# Altium PCB PCBCharger.PcbDoc
Units mil, origin at the board's own origin, x right, y up, seen from the top; angles counter-clockwise.
Board outline 1545 x 1485 mil, 2 copper layers (Top Layer, Bottom Layer); 18 components, 9 nets, 52 pads, 10 vias.
Unrouted connection lines stored in the file: 3.
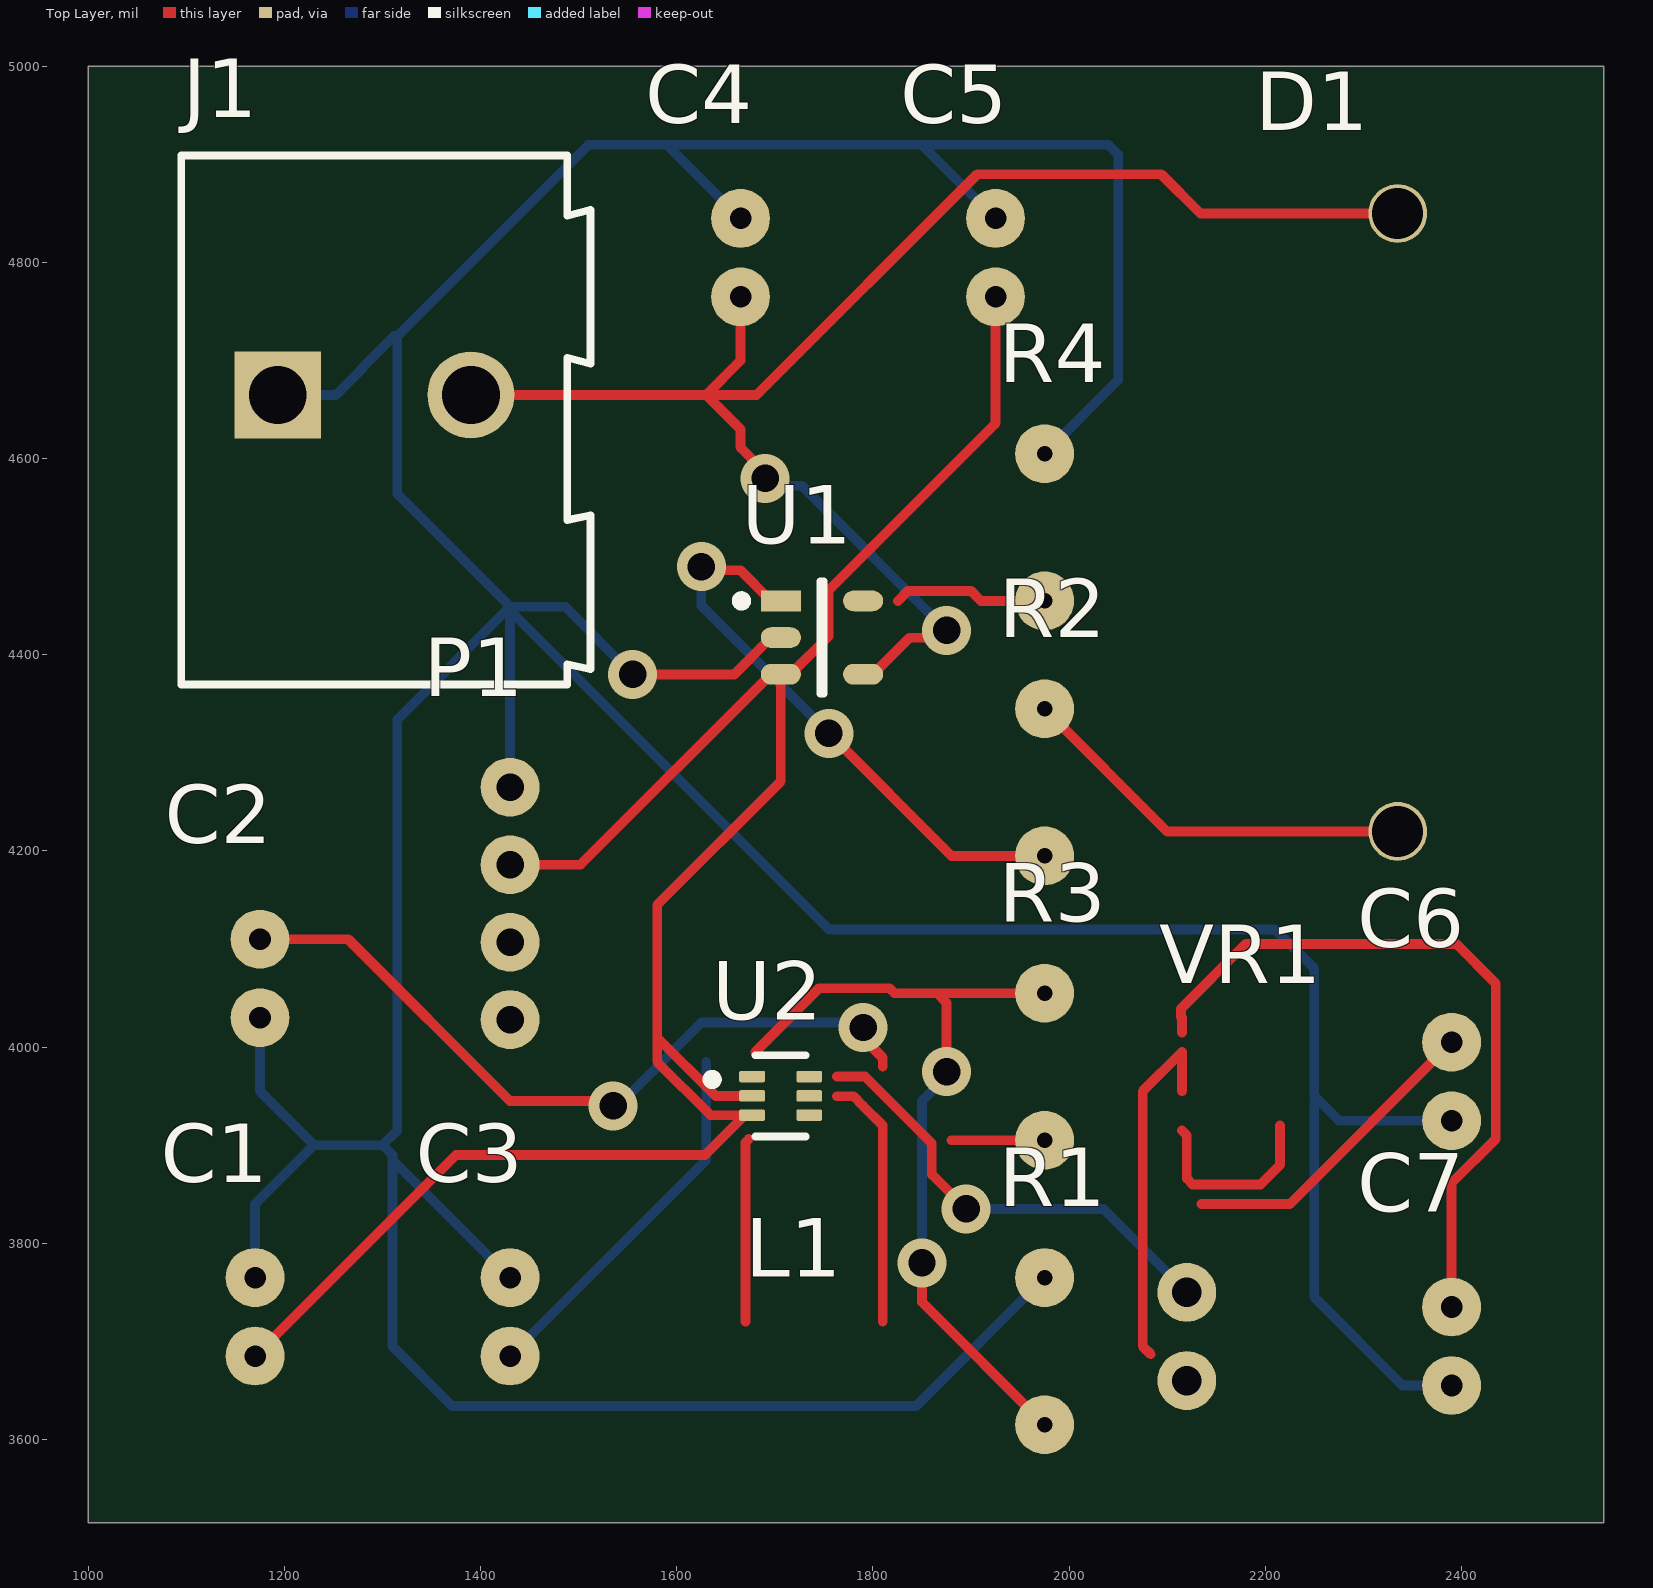
[diagram p0: Top Layer view]
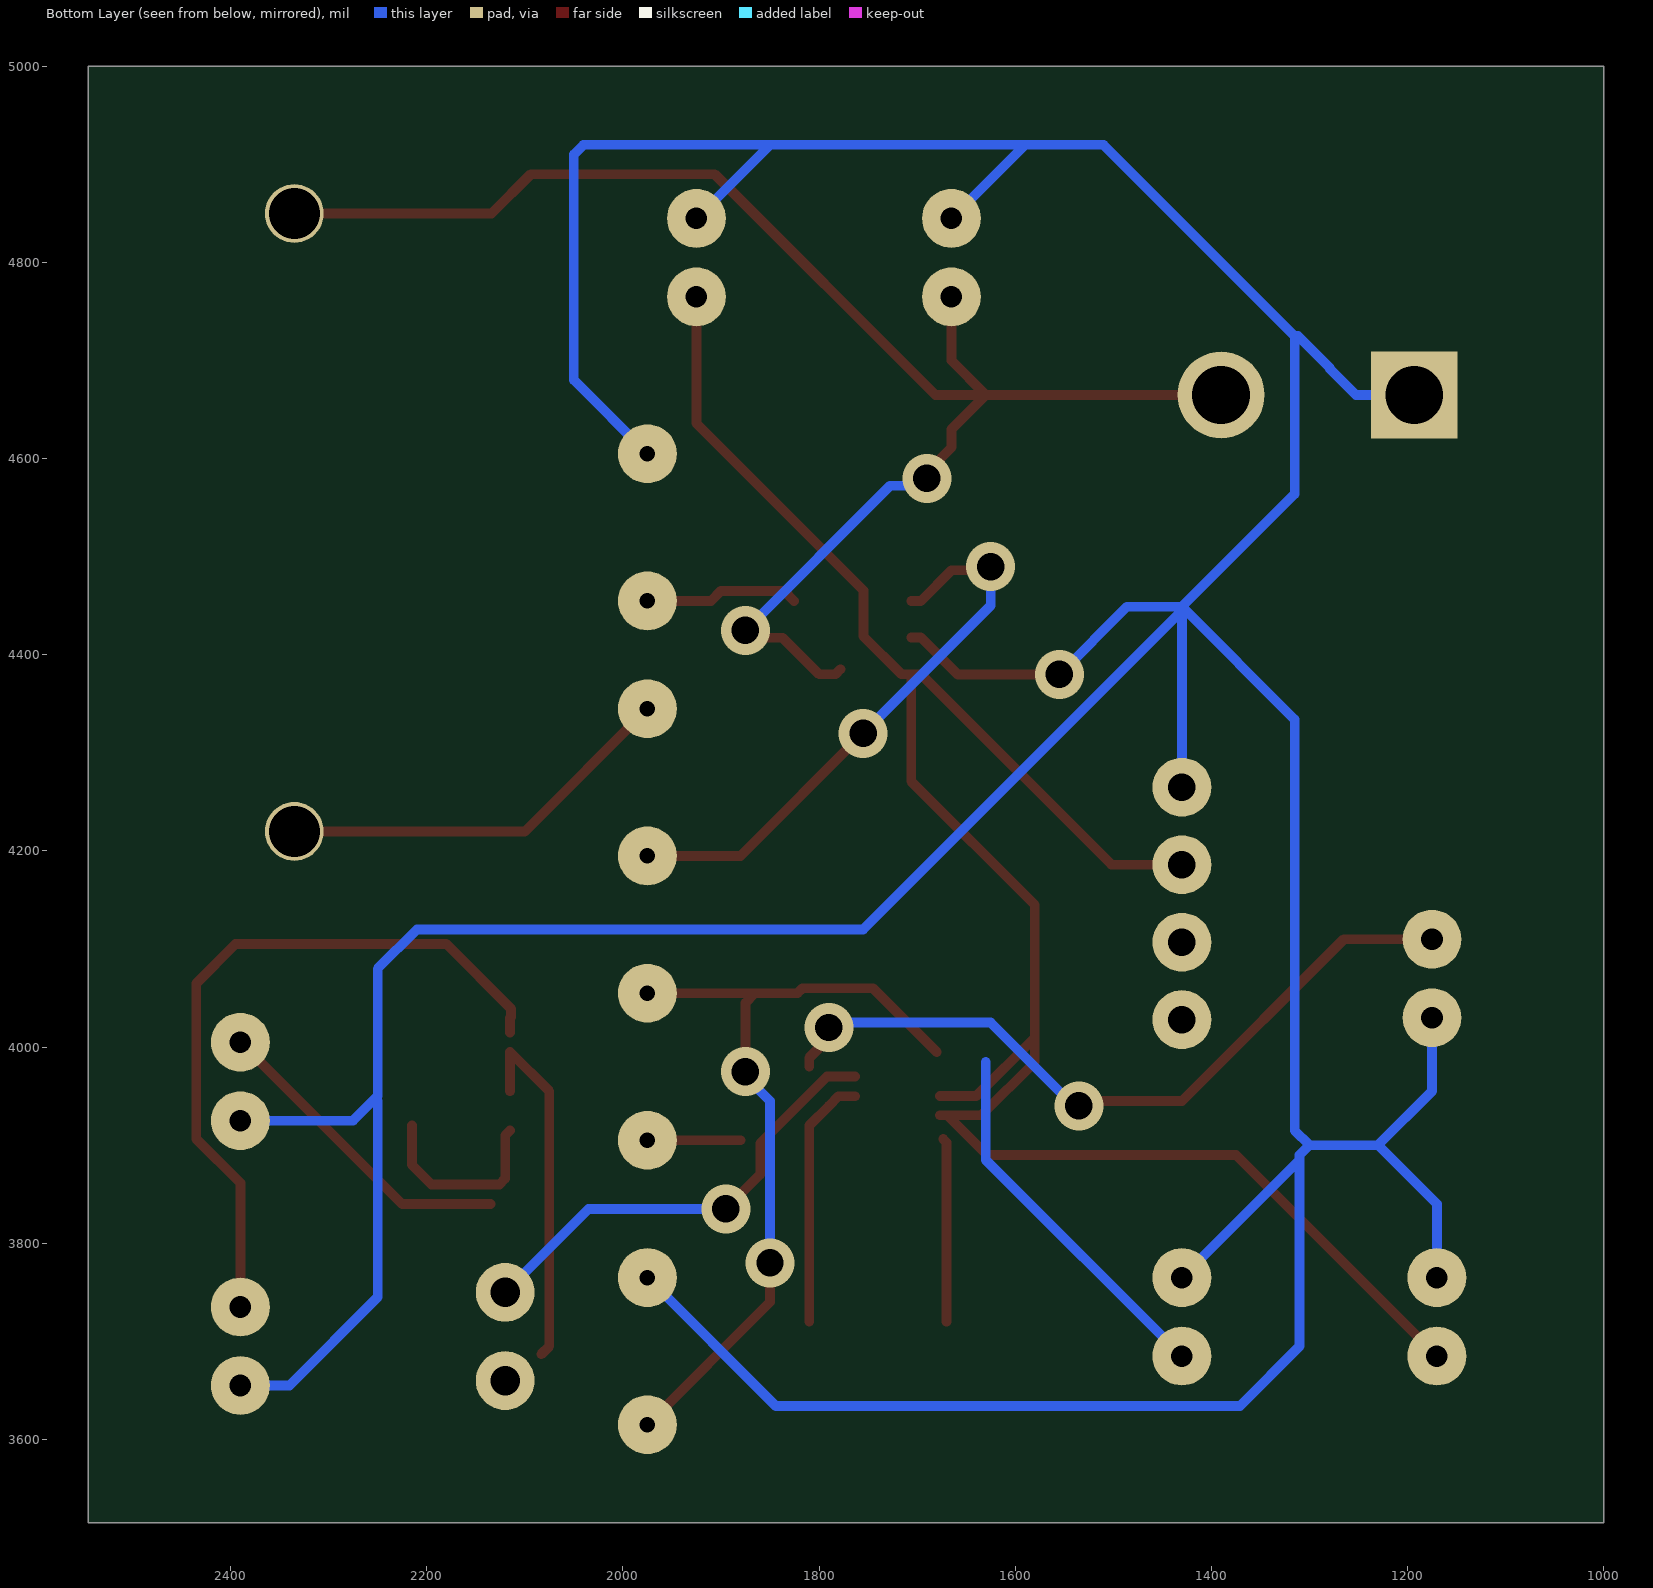
[diagram p1: Bottom Layer view, seen from below]

## Layer stack, top to bottom
Top Solder: solder mask 0.4, Solder Resist, Dk 3.5
Top Layer: signal copper 1.4
Dielectric 1: dielectric 12.6, FR-4, Dk 4.8
Bottom Layer: signal copper 1.4
Bottom Solder: solder mask 0.4, Solder Resist, Dk 3.5

## Board outline
1000,3515 2545,3515 2545,5000 1000,5000

## Design rules (kind name [scope] priority, off if disabled: settings)
Clearance [All] p1: gap=10 ignorepadtopadclearanceinfootprint=FALSE except(0: Arc-Hole Track-Hole SMDPad-Hole THPad-Hole Via-Hole Fill-Hole Poly-Hole Region-Hole Text-Hole)
PolygonConnect [All] p1: connectstyle=Relief reliefconductorwidth=10 reliefentries=4 polygonreliefangle="90 Angle" airgapwidth=10
RoutingVias [All] p1: holewidth=28 width=50 viastyle="Through Hole" minholewidth=28 minwidth=50 maxholewidth=28 maxwidth=50
SolderMaskExpansion [All] p1: expansion=4 istentingtop=FALSE
Width [All] p1: maxlimit=10 minlimit=10 preferedwidth=10
30 further rules are at their usual default settings.

## Classes and differential pairs
component class BatterySchematic1: L1 VR1

## Components (designator, comment, footprint, x,y, rotation, side; value= is the part's Value field where it differs from the comment)
C1 "4.7u" PCBComponent_1#1 1170,3725 r0 top (schematic designator C?)
C2 "4.7u" PCBComponent_1#1 1175,4070 r0 top (schematic designator C?)
C3 "22u" PCBComponent_1#1 1430,3725 r0 top (schematic designator C?)
C4 "22u" PCBComponent_1#1 1665,4805 r0 top (schematic designator C?)
C5 "10u" PCBComponent_1#1 1925,4805 r0 top (schematic designator C?)
C6 "4.7u" PCBComponent_1#2 2390,3965 r0 top (schematic designator C?)
C7 "4.7u" PCBComponent_1#1 2390,3695 r0 top (schematic designator C?)
D1 "Schottky Diode" PCBComponent_1#3 2335,4850 r0 top (schematic designator D?)
J1 "691211720002" 691211720002 1291.58,4639.41 r0 top (schematic designator J?)
L1 "Component_1" PCBComponent_1#4 1740,3655 r0 top (schematic designator L?)
P1 "PHR-2" PCBComponent_1#5 1430,4146 r0 top (schematic designator P?)
R1 "2k" PCBComponent_1#6 1975,3765 r0 top (schematic designator R?)
R2 "470" PCBComponent_1#6 1975,4345 r0 top (schematic designator R?)
R3 "732k" PCBComponent_1#6 1975,4055 r0 top (schematic designator R?)
R4 "100k" PCBComponent_1#6 1975,4605 r0 top (schematic designator R?)
U1 "MCP73831T-2ATI/OT" FP-C04-091-OT-IPC_C 1748.02,4417.6 r0 top (schematic designator U?)
U2 "TPS61023DRLT" FP-DRL0006A-MFG 1705.87,3950.32 r0 top (schematic designator U?)
VR1 "Component_1" PCBComponent_1#7 2165,3955 r0 top (schematic designator VR)

## Footprints (in the part's own frame and the unit in brackets; to place one, negate y for a bottom-side part, rotate by r counter-clockwise, add the part's x,y. Pads: shape width x height; smd on the part's side, far side on the other; paste and mask are expansions set on the pad)
691211720002 [mm] "5,00mm - modular - green -45¡ã entry with rising cage clamp - 02p"
  rect 2.25x2.25 hole 1.5: 1(-2.5,0.65)
  round 2.25 hole 1.5: 2(2.5,0.65)
  silkscreen extent -5,-6.85 5.6,6.85, body extent -5,-6.85 5.6,6.85, height 15.72
FP-C04-091-OT-IPC_C [mm]
  rect 1.038x0.538 smd paste+0 mask+0: 1(-1.066,0.95)
  rrect100% 1.038x0.538 smd paste+0 mask+0: 2(-1.066,0) 3(-1.066,-0.95) 4(1.066,-0.95) 5(1.066,0.95)
  silkscreen extent -2.21,-1.45 0.05,1.45
FP-DRL0006A-MFG [mm]
  rrect33% 0.67x0.3 smd paste+0 mask+0: 1(-0.74,0.5) 2(-0.74,0) 3(-0.74,-0.5) 4(0.74,-0.5) 5(0.74,0) 6(0.74,0.5)
  silkscreen extent -1.9,-1.05 0.65,1.05, body extent -1.17,-1.1 1.17,1.1, height 0.25
PCBComponent_1#1 [mil]
  round 60 hole 22: 1(0,40) 2(0,-40)
  body extent -98,-98 98,98, height 433
PCBComponent_1#2 [mil]
  round 60 hole 22: 1(0,40) ""(0,-40)
  body extent -98,-98 98,98, height 433
PCBComponent_1#3 [mil]
  round 60 hole 52: 1(0,0) 2(0,-630)
  body extent -105,-498 105,-122, height 210
PCBComponent_1#4 [mil]
  rect 18x34 on Top Solder: 1(-71,63) 2(71,63) 3(-71,-63) 4(71,-63)
  body extent -80,-80 80,80, height 122
PCBComponent_1#5 [mil]
  round 60 hole 28: 1(0,119) 2(0,40) 3(0,-39) 4(0,-118)
  body extent -88,-174 88,174, height 236
PCBComponent_1#6 [mil]
  round 60 hole 16: 1(0,0) 2(0,-150)
  body extent -40,-148 40,-2, height 80
PCBComponent_1#7 [mil]
  rect 29x16 on Top Solder: 1(-49,39) 2(-49,1) 3(-49,-37) 4(49,37) 5(49,-37)
  body extent -35,-80 35,80, height 45

## Part data
C1 C2 C3 C4 C5 C6 C7 D1 R1 R2 R3 R4: library part Component_1
J1: library part CMP-1502-02524-1, "Serie 211 - 5.00 mm 45deg Entry Modular with Rising Cage Clamp - 15.50 mm Height WR-TBL, 2 pin", Manufacturer="Wurth Elektronik", Operating Temperature=-40to105degC, Datasheet URL=http://katalog.we-online.de/em/datasheet/6912117200xx.pdf, Manufacturer URL=http://www.we-online.de, Mounting Technology=THT, Package Reference=691211720002, Packaging=Box, Part Number=691211720002, Pin Number=2, Pitch=5.00mm, Publisher=WurthElektronik
P1: "PH Series 2 Position 2 mm Pitch Free Hanging Housing Connector", Package=None, Availability=Unavailable, MP=PHR-2, Price=None
U1: library part CMP-0133-00144-2, "IC CONTROLLR LI-ION 4.2V SOT23-5", Case/Package=SOT-23, Max Charge Current=500mA, Max Operating Temperature=85°C, Max Output Voltage=4.232V, Max Supply Voltage=6V, Min Operating Temperature=-40°C, Min Output Voltage=4.168V, Min Supply Voltage=3.75V, Output Voltage=4.2V, Package Quantity=3000, Height=1.3mm, Lead Free="Lead Free", Length=3.1mm, Max Output Current=500mA, Mount="Surface Mount", Number of Cells=1, Number of Pins=5, Output Current=500mA, Packaging="Tape and Reel", REACH SVHC="No SVHC", Width=1.8mm
U2: library part CMP-04918-000657-1, "IC REG BOOST ADJ 3A SOT563"

## Free pads (board coordinates)
  round 60 hole 30: BatOut(2120,3750) VROut(2120,3660)

## Via types
v1: diameter 50, hole 28, Top Layer to Bottom Layer, 10 vias

## Nets (pads, with @x,y where several pads share a name; then routed paths per layer and width w, separated by ;. In a path a pad name is that pad's centre, name@x,y a point inside that pad or via, vN(x,y) a via of type N, cw(c..) or ccw(c..) an arc to the next point about the centre after c; other vN are vias at no path point)
"3.0 - 4.2V": C1.2 C5.2 P1.2 U1.3 U2.2 U2.3 | length 2127.1
  Top Layer w10: C1.2 1375,3890 1628.82,3890 U2.3@1669.45,3930.63 ; P1.2 1502,4186 1696.2,4380.2 U1.3 ; U2.3 U2.3@1669.45,3930.63 ; U2.2 1639.68,3950.32 1580,4010 ; C5.2 1925,4636.04 1754.56,4465.6 1754.56,4418.86 1715.89,4380.2 U1.3 ; 1580,4010 1580,4145 1706.05,4271.05 U1.3 ; 1580,4010 1580,3985 1634.37,3930.63 U2.3@1669.45,3930.63
5V: C4.2 D1.1 J1.2 U1.4 | length 1646
  Top Layer w10: J1.2 1630,4665 ; C4.2 1665,4700 1630,4665 ; v1(1690,4580) 1690,4586.57 1665,4611.57 1665,4630 1630,4665 ; U1.4@1778.01,4385.36 1783.18,4380.2 U1.4 1799.85,4380.2 1837,4417.35 1867.35,4417.35 v1(1875,4425) ; D1.1 2133.92,4850 2093.92,4890 1906.36,4890 1681.36,4665 1630,4665
  Bottom Layer w10: v1(1690,4580) 1697.65,4572.35 1727.65,4572.35 v1(1875,4425)
GND: C1.1 C2.2 C3.1 C4.1 C5.1 C6. C7.2 J1.1 P1.1 R1.1 R4.1 U1.2 U2.4 | length 6094.2
  Top Layer w10: v1(1555,4380) 1658.6,4380 1696.2,4417.6 U1.2
  Bottom Layer w10: C1.1 1170,3840 1230,3900 ; C2.2 1175,3955 1230,3900 ; J1.1 1252.44,4665 1279.58,4692.14 1279.58,4692.86 1311.72,4725 1315,4725 ; C3.1 1310,3885 ; P1.1 1430,4445 ; v1(1555,4380) 1485.95,4449.05 1430,4449.05 ; C4.1 1590,4920 ; C5.1 1850,4920 ; R1.1 1844.14,3634.14 1370.86,3634.14 1310,3695 1310,3885 ; R4.1 2050,4680 2050,4910 2040,4920 1850,4920 ; 2250,3945 2250,3745 2340,3655 C7.2 ; C6.@2380.43,3934.57 C6. 2275,3925 2250,3950 2250,4080 2210,4120 1755,4120 1430,4445 ; 1230,3900 1300,3900 ; 1300,3900 1315,3915 1315,4334.05 1430,4449.05 ; 1300,3900 1310,3890 1310,3885 ; 1315,4725 1315,4564.05 1430,4449.05 ; 1315,4725 1510,4920 1590,4920 ; 1430,4445 1430,4449.05 ; 1590,4920 1850,4920
NetC?_1: C2.1 | length 771
  Top Layer w10: C2.1 1265,4110 1430,3945 1530,3945 v1(1535,3940) ; v1(1790,4020) 1790,4009.18 1810,3989.18 1810,3980
  Bottom Layer w10: v1(1535,3940) 1540,3940 1625,4025 1785,4025 v1(1790,4020)
NetC?_2: C3.2 pad.BatOut | length 849.4
  Top Layer w10: 1763.19,3970 1791.72,3970 1860,3901.72 1860,3870 v1(1895,3835)
  Bottom Layer w10: C3.2 1630,3885 1630,3985 ; v1(1895,3835) 2035,3835 pad.BatOut
NetD?_2: D1.2 R2.1 | length 411.8
  Top Layer w10: R2.1 2100,4220 D1.2
NetL?_2: U2.5
NetR?_1: R1.2 R3.1 U2.1 | length 830.2
  Top Layer w10: 1680,3995 1745,4060 1816.8,4060 1821.8,4055 1865.17,4055 ; v1(1850,3780) 1850,3740 R1.2 ; v1(1875,3975) 1875,4045.17 1865.17,4055 ; R3.1 1865.17,4055
  Bottom Layer w10: v1(1850,3780) 1850,3945 1875,3970 v1(1875,3975)
NetR?_2: R2.2 U1.1 | length 591.2
  Top Layer w10: v1(1625,4490) 1628.8,4486.2 1665,4486.2 1696.2,4455 U1.1 ; v1(1755,4320) 1880,4195 R2.2
  Bottom Layer w10: v1(1625,4490) 1625,4450 v1(1755,4320)
pads on no net: C6.1 C7.1 L1.1 L1.2 L1.3 L1.4 P1.3 P1.4 R3.2 R4.2 U1.5 U2.6 VR1.1 VR1.2 VR1.3 VR1.4 VR1.5
copper on no net: | length 2326.1
  Top Layer w10: 1670,3720 1670,3902.9 1673.41,3906.31 ; 1763.19,3950 1780,3950 1790,3940 1810,3920 1810,3720 ; 1825.44,4455 1835.44,4465 1900.17,4465 1910.17,4455 1975,4455 ; 1880,3905 1975,3905 ; 2083.18,3686.82 2075,3695 2075,3955 2115,3995 2115,3955 ; 2115,3915 2120,3910 2120,3865.86 2125.86,3860 2195,3860 2215,3880 2215,3920 ; 2115,4015 2115,4030 2114.14,4030.86 2114.14,4039.14 2180,4105 2395,4105 2435,4065 2435,3906.36 2390,3861.36 2390,3735 ; 2135,3840 2225,3840 2390,4005